# Allegro board CI-D0XGS02S.brd
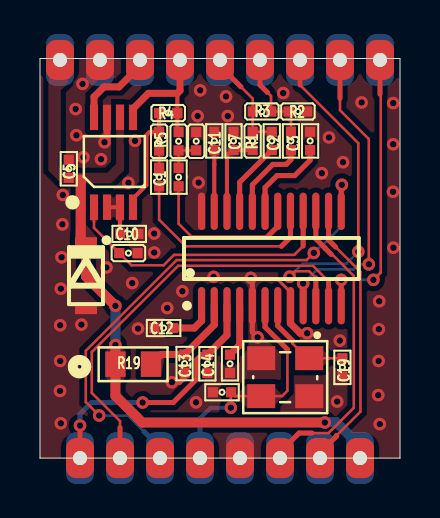
[diagram p0: board, top side]
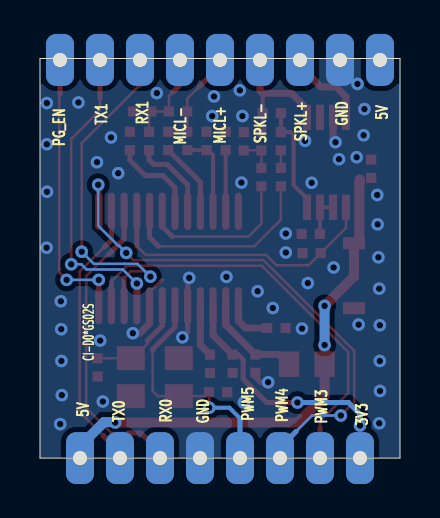
[diagram p1: board, bottom side, seen from below]

Outline 18 x 20 mm; copper layers: TOP, BOTTOM. Coordinates in mm from the lower left corner of the outline.
Outline path: 0,20 18,20 18,0 0,0 0,20

## Design rules (mm)
constraint set DEFAULT: min track width 0.127
net group SPKL: nets SPKL+

## Placement (name value [footprint] x y rotation side)
C1  0.1uF/10V  [C0402]  5.96 14.06 270 top
C2  0.1uF/10V  [C0402]  11.59 15.88 270 top
C3  0.1uF/10V  [C0402]  12.55 15.88 270 top
C5  4.7uF/10V  [C0402]  1.44 14.48 270 top
C7  4.7uF/6.3V  [C0402]  9.67 15.88 90 top
C9  0.1uF/10V  [C0402]  6.93 14.06 270 top
C10  1uF/6.3V  [C0402]  4.46 11.22 180 top
C11  4.7uF/6.3V  [C0402]  8.72 15.88 270 top
C12  4.7uF/6.3V  [C0402]  6.18 6.51 180 top
C13  4.7uF/10V  [C0402]  7.23 4.73 270 top
C14  4.7uF/6.3V  [C0402]  8.37 4.72 270 top
C15  4.7uF/6.3V  [C0402]  9.5 4.72 270 top
C16  22PF/50V  [C0402]  9.1 3.29 0 top
C19  22PF/50V  [C0402]  15.12 4.54 90 top
C20  0.1uF/10V NC  [C0402]  13.51 15.88 270 top
D1  SMF5.0A  [SOD-123FL]  2.3 9.13 270 top
J1  HEADER 9  [HDR200M-1X9-YP]  1 19.93 0 top
J2  HEADER 8  [HDR200M-1X8-YP]  2 0 0 top
R1  2.2K 1%  [R0402]  10.63 15.88 90 top
R2  2.2K 1%  [R0402]  12.89 17.35 0 top
R3  10K 1%  NC  [R0402]  11.1 17.35 0 top
R4  22K 1%  [R0402]  6.41 17.27 0 top
R5  4.7K 5%  [R0402]  5.96 15.86 90 top
R16  2.2K 1%  [R0402]  7.81 15.86 270 top
R17  22K 1%  [R0402]  6.93 15.86 90 top
R18  4.7K 5%  [R0402]  4.42 10.26 180 top
R19  2R 1%  [R0805]  4.66 4.7 0 top
U1  XPT4890  [TSSOP_8]  2.7 12.05 90 top
U2  CI1302  [SOP63P600X175-24L]  11.57 9.99 0 top
Y1  12.288MHZ  [X4-3225]  12.26 4.05 180 top

## Library data of the parts
C1-C3 C5 C7 C9-C16 C19 C20 = CAP
D1 = DIODE32_4: Tolerance: RichardLC; User Part Number: pn
J1 = HEADER 9: Tolerance: RichardLC; User Part Number: partnum
J2 = HEADER 8: Tolerance: RichardLC; User Part Number: partnum
R1-R5 R16-R19 = RES
U1 = Amplifier-fm8002a
U2 = CI1302: Tolerance: RichardLC; User Part Number: pn
Y1 = CRY-4

## Footprints (pads in the part's own frame, mm; a bottom-side part is the same pattern mirrored in y, then rotated)
C0402
  rect 0.508x0.508 smd: 1(-0.457,0) 2(0.457,0)
HDR200M-1X8-YP
  rrect 1.4x2 hole 0.7: 1(0,0) 2(2,0) 3(4,0) 4(6,0) 5(8,0) 6(10,0) 7(12,0) 8(14,0)
HDR200M-1X9-YP
  rrect 1.4x2 hole 0.7: 1(0,0) 2(2,0) 3(4,0) 4(6,0) 5(8,0) 6(10,0) 7(12,0) 8(14,0) 9(16,0)
R0402
  rect 0.508x0.508 smd: 1(-0.457,0) 2(0.457,0)
R0805
  rect 1.016x1.27 smd: 1(-0.889,0) 2(0.889,0)
SOD-123FL
  rect 0.6x1.1 smd: 1(-1.625,0) 2(1.625,0)
SOP63P600X175-24L
  oval 0.36x1.87 smd: 1(-3.492,-2.363) 2(-2.858,-2.363) 3(-2.222,-2.363) 4(-1.588,-2.363) 5(-0.953,-2.363) 6(-0.318,-2.363) 7(0.317,-2.363) 8(0.953,-2.363) 9(1.588,-2.363) 10(2.222,-2.363) 11(2.857,-2.363) 12(3.492,-2.363) 13(3.492,2.363) 14(2.858,2.363) 15(2.222,2.363) 16(1.588,2.363) 17(0.953,2.363) 18(0.318,2.363) 19(-0.317,2.363) 20(-0.953,2.363) 21(-1.588,2.363) 22(-2.222,2.363) 23(-2.857,2.363) 24(-3.492,2.363)
TSSOP_8
  rect 1.27x0.406 smd: 1(0.508,0) 2(0.508,-0.65) 3(0.508,-1.3) 4(0.508,-1.95) 5(5.004,-1.95) 6(5.004,-1.3) 7(5.004,-0.65) 8(5.004,0)
X4-3225
  rect 1.399x1.199 smd: 1(-1.2,-0.95) 2(1.2,-0.95) 3(1.2,0.95) 4(-1.2,0.95)

## Nets
3V3: C14.1 J2.1 U2.3
GND_SIGNAL: C5.1 C7.2 C10.1 C11.1 C12.2 C13.2 C14.2 C15.2 C16.1 C19.1 C20.1 D1.2 J1.2 J2.5 R2.2 R16.1 R18.1 U1.7 U2.5 U2.8 U2.24 Y1.2 Y1.4(GND2)
VDD_5V: C5.2 D1.1 J1.1 J2.8 R19.1 U1.6
HPOUT_L: C1.2 U2.17
MICBIAS: C7.1 R1.1 U2.22
MICL+: C2.1 J1.5 R1.2 R3.1
MICL-: C3.1 J1.6 R2.1 R3.2
MICN_L: C3.2 U2.20
MICP_L: C2.2 U2.21
MICP_R: C9.2 U2.18
MICR+: C9.1 R16.2 R17.1
MUTE: R18.2 U1.1 U2.16
PG_EN: J1.9 U2.12
PWM3: J2.2 U2.11
PWM4: J2.3 U2.13
PWM5: C16.2 J2.4 U2.6 Y1.3
SPKL+: J1.3 U1.8
SPKL-: J1.4 R4.2 R17.2 U1.5
UART0_RX: J2.6 U2.15
UART0_TX: J2.7 U2.14
UART1_RX: J1.7 U2.10
UART1_TX: J1.8 U2.9
N17240368: C10.2 U1.2(VREF) U1.3
N17240395: R4.1 R5.2 U1.4
N17448971: C1.1 R5.1
N17518753: C11.2 U2.23
N17519460: C15.1 U2.4
N17520749: C19.2 U2.7(XOUT/PA1) Y1.1
N17521461: C20.2 U2.19
N17548284: C12.1 U2.1
N17548305: C13.1 R19.2 U2.2

## Via types
v1: diameter 0.63, hole 0.33, TOP to BOTTOM, 67 vias

## Routing (per net, layer and track width the routed paths; a pad name or vN(x,y) marks a point on that pad's centre or on a via; arc(x,y) is an arc through that point)
3V3: length 13.2
  TOP w0.254: v1(2,1.63) J2.1 ; v1(5.13,2.78) 6.66,2.78 7.84,3.96 7.84,4.92 8.09,5.18 C14.1
  TOP w0.35: C14.1 9.35,6.16 U2.3
  BOTTOM w0.254: v1(2,1.63) 2,2.2 2.58,2.78 v1(5.13,2.78)
GND_SIGNAL: length 8.1
  TOP w0.15: 12.46,8.37 11.91,8.92 11.87,8.92
  TOP w0.254: v1(6.59,3.79) 6.98,3.79 7.23,4.05 7.23,4.27 ; v1(10.54,9.02) 10.62,8.94 U2.5 10.62,6.3 v1(10.88,6.04)
  TOP w0.35: v1(13.36,6.25) 13.01,6.25 12.52,6.74 U2.8 ; v1(3.23,15.81) 3.35,15.93 U1.7
  vias: v1(1.04,8.48) v1(1.01,6.65) v1(1.01,4.86) v1(1,3.36) v1(1.04,1.74) v1(1.14,13.17) v1(1.12,11.7) v1(1.08,10.05) v1(1.78,17.47) v1(1.82,16.16) v1(2.13,18.73) v1(2.07,6.68) v1(2.17,15.06) v1(3,19.93) v1(3.05,14.96) v1(3.32,9.54) v1(4.42,13.78) v1(4.61,8.76) v1(4.75,15.88) v1(4.9,6.48) v1(5.71,11.24) v1(5.71,10.29) v1(6.36,7.51) v1(7.12,8.35) v1(7.8,2.79) v1(7.88,17.12) v1(7.93,13.79) v1(8.01,18.41) v1(8.68,9.07) v1(9.3,18.1) v1(9.39,17.12) v1(12.16,18.27) v1(14.09,14.26) v1(14.45,16.05) v1(14.86,2.83) v1(14.99,5.88) v1(15.15,14.81) v1(16.08,17.8) v1(16.94,6.45) v1(16.93,4.86) v1(16.91,3.15) v1(16.96,7.85) v1(16.99,1.7) v1(17.65,13.33) v1(17.66,17.77) v1(17.66,15.71) v1(17.67,10.53)
VDD_5V: length 25.8
  TOP w0.35: 2.1,13.91 2.01,13.82 2,13.88
  TOP w0.5: D1.1 2.3,9.09 v1(3.77,7.62) ; v1(3.77,5.66) R19.1 3.77,3.12 5.11,1.78 v1(14.24,1.78)
  TOP w0.508: 2.01,13.95 2.01,13.82 2.04,13.8 2.04,10.76 D1.1
  BOTTOM w0.5: v1(3.77,5.66) v1(3.77,7.62) ; J2.8 16,0.6 14.8,1.8 14.26,1.8 v1(14.24,1.78)
HPOUT_L: length 10.3
  TOP w0.127: C1.2 5.96,11.94 7.29,10.6 12.07,10.6
  TOP w0.254: U2.17 12.52,11.05 12.07,10.6
MICBIAS: length 4.2
  TOP w0.203: U2.22 9.35,15.16 9.6,15.42 C7.1 R1.1
MICL+: length 5.2
  TOP w0.127: 10.04,18.59 10.64,17.99 R3.1 10.64,16.78 10.63,16.78 R1.2 C2.1
  TOP w0.254: J1.5 9,19.63 10.04,18.59
MICL-: length 4.8
  TOP w0.127: 11.37,18.31 11.55,18.12 R3.2 R2.1 12.55,17.24 C3.1
  TOP w0.254: J1.6 11,18.68 11.37,18.31
MICN_L: length 4.3
  TOP w0.254: U2.20 10.62,13.68 11.64,14.7 12.31,14.7 12.55,14.94 C3.2
MICP_L: length 3.7
  TOP w0.254: C2.2 9.98,13.81 U2.21
MICP_R: length 8.1
  TOP w0.127: 11.38,11.09 7.57,11.09 6.93,11.73 C9.2
  TOP w0.254: 11.38,11.09 11.89,11.6 U2.18
MICR+: length 1.8
  TOP w0.127: C9.1 6.93,15.4 7.81,15.4
MUTE: length 14.4
  TOP w0.127: U1.1 2.7,11.52 R18.2 4.57,9.65 6.18,9.65 6.7,10.17 12.71,10.17 13.16,10.62
  TOP w0.254: U2.16 13.16,10.62
PG_EN: length 14.1
  TOP w0.127: 17,18.22 17.04,18.18 17.04,9.31 17.03,9.3 17.03,9.28 v1(16.67,8.92)
  TOP w0.254: v1(15.06,8.92) U2.12 ; 17,18.22 J1.9
  BOTTOM w0.127: v1(15.06,8.92) v1(16.67,8.92)
PWM3: length 21.1
  TOP w0.127: 4,1.52 4,1.85 2.59,3.26 2.59,5.31 6.91,9.62 13.65,9.62 14.43,8.84
  TOP w0.254: J2.2 4,1.52 ; 14.43,8.84 U2.11
PWM4: length 26.5
  TOP w0.127: 15.06,13.45 15.09,13.48 v1(15.09,13.68) ; v1(13.69,10.27) 13.33,9.91 6.83,9.91 2.29,5.37 2.29,2.8 v1(2.96,2.13)
  TOP w0.254: 15.06,13.45 U2.13
  BOTTOM w0.127: v1(13.69,10.27) 14.05,10.63 14.09,10.63 15.09,11.63 v1(15.09,13.68) ; 5.19,1.33 4.4,2.13 v1(2.96,2.13)
  BOTTOM w0.254: J2.3 6,0.53 5.19,1.33
PWM5: length 12.2
  TOP w0.127: 9.57,3.28 9.54,3.25 v1(9.54,2.52) ; 9.57,3.28 9.75,3.1 Y1.3 12.1,3.1 12.37,3.37 12.37,5.37 ; 9.57,3.28 C16.2
  TOP w0.254: 12.37,5.37 12.37,5.44 11.25,6.56 U2.6
  BOTTOM w0.2: 8,1.99 8.53,2.52 v1(9.54,2.52)
  BOTTOM w0.254: 8,1.99 J2.4
SPKL+: length 4.3
  TOP w0.35: J1.3 5,19.63 3.95,18.58 3.2,18.58 2.7,18.08 U1.8
SPKL-: length 6.7
  TOP w0.203: 6.87,18.26 R4.2 6.87,16.38 R17.2
  TOP w0.35: J1.4 7,18.39 6.87,18.26 5.42,18.26 4.65,17.49 U1.5
UART0_RX: length 15.6
  TOP w0.127: 14.56,10.19 14.61,10.19 15.69,9.12 15.69,2.52 14.43,1.25 13.6,1.25
  TOP w0.254: 13.6,1.25 12.95,1.25 12,0.3 J2.6 ; U2.15 13.79,10.97 14.26,10.51 14.26,10.5 14.56,10.19
UART0_TX: length 13.8
  TOP w0.127: 14.78,10.56 16.02,9.33 16.02,2.32 14.84,1.14
  TOP w0.254: U2.14 14.43,10.92 14.78,10.56 ; 14.84,1.14 14.83,1.13 14.83,1.1 14,0.28 J2.7
UART1_RX: length 17.7
  TOP w0.127: v1(15.91,10.33) 15.91,15.76 13,18.68 ; v1(12.48,9.08) 12.48,9.08 12.75,9.35 13.46,9.35 13.79,9.02
  TOP w0.254: U2.10 13.79,9.02 ; 13,18.68 J1.7
  BOTTOM w0.127: v1(15.91,10.33) 15.31,9.72 13.78,9.72 13.78,9.72 13.12,9.72 12.84,9.44 v1(12.48,9.08)
UART1_TX: length 15.6
  TOP w0.127: v1(16.44,9.7) 16.44,15.97 15,17.41 15,18.01
  TOP w0.254: 15,18.01 J1.8 ; U2.9 v1(13.16,8.74)
  BOTTOM w0.127: v1(16.44,9.7) 15.93,9.7 15.67,9.44 13.86,9.44 v1(13.16,8.74)
N17240368: length 2
  TOP w0.203: U1.2 U1.3 4,11.22 C10.2
N17240395: length 5.5
  TOP w0.203: R4.1 5.95,16.32 R5.2 5.47,16.32 5.32,16.16 5.32,13.66 4.65,12.99 U1.4
N17448971: length 0.9
  TOP w0.127: C1.1 5.96,15.4
N17518753: length 3.1
  TOP w0.203: C11.2 8.72,14.7 8.71,14.7 8.71,12.35
N17519460: length 2.6
  TOP w0.35: C15.1 9.98,5.66 U2.4
N17520749: length 5
  TOP w0.127: C19.2 14.47,5 14.47,5 Y1.1 13.36,5 12.62,5.74 12.62,5.88
  TOP w0.254: 12.62,5.88 11.89,6.62 U2.7
N17521461: length 4.5
  TOP w0.254: U2.19 11.25,13.54 11.85,14.14 12.74,14.14 13.51,14.91 C20.2
N17548284: length 2.3
  TOP w0.35: C12.1 7.72,6.51 8.08,6.87 U2.1
N17548305: length 4.9
  TOP w0.35: U2.2 8.71,6.67 C13.1 6.08,5.19 5.59,4.7 R19.2

## Copper pours and planes (outline as drawn; the poured copper is in the pictures)
GND_SIGNAL on TOP: 0,0 0,20 18,20 18,0 ; 4 cut-outs
GND_SIGNAL on BOTTOM: 0,0 0,20 18,20 18,0 ; 1 cut-out
VDD_5V on TOP: 1.27,19.99 0.54,19.99 0.42,19.87 0.42,14.39 1.06,13.75 3.56,13.75 4.2,14.39 4.2,17.7 4.19,17.71 3.81,17.71 3.81,14.73 3.36,14.28 1.21,14.28 1.04,14.45 1.04,18.41 1.42,18.79 1.42,19.84

Small or netless copper shapes (teardrops, artwork), in the pictures only: 66 on TOP, 12 on BOTTOM

## Text on the board
Ref Des/Silkscreen Bottom: CI-D0*GS02S | 3V3 | 5V | GND | PWM3 | SPKL+ | PWM4 | SPKL- | PWM5 | MICL+ | MICL- | RX0 | RX1 | TX0 | TX1 | PG_EN
